# Altium PCB Board IO.PcbDoc
Units mm, origin at the board's own origin, x right, y up, seen from the top; angles counter-clockwise.
Board outline 146 x 86 mm, 2 copper layers (Top Layer, Bottom Layer); 27 components, 26 nets, 52 pads, 0 vias.
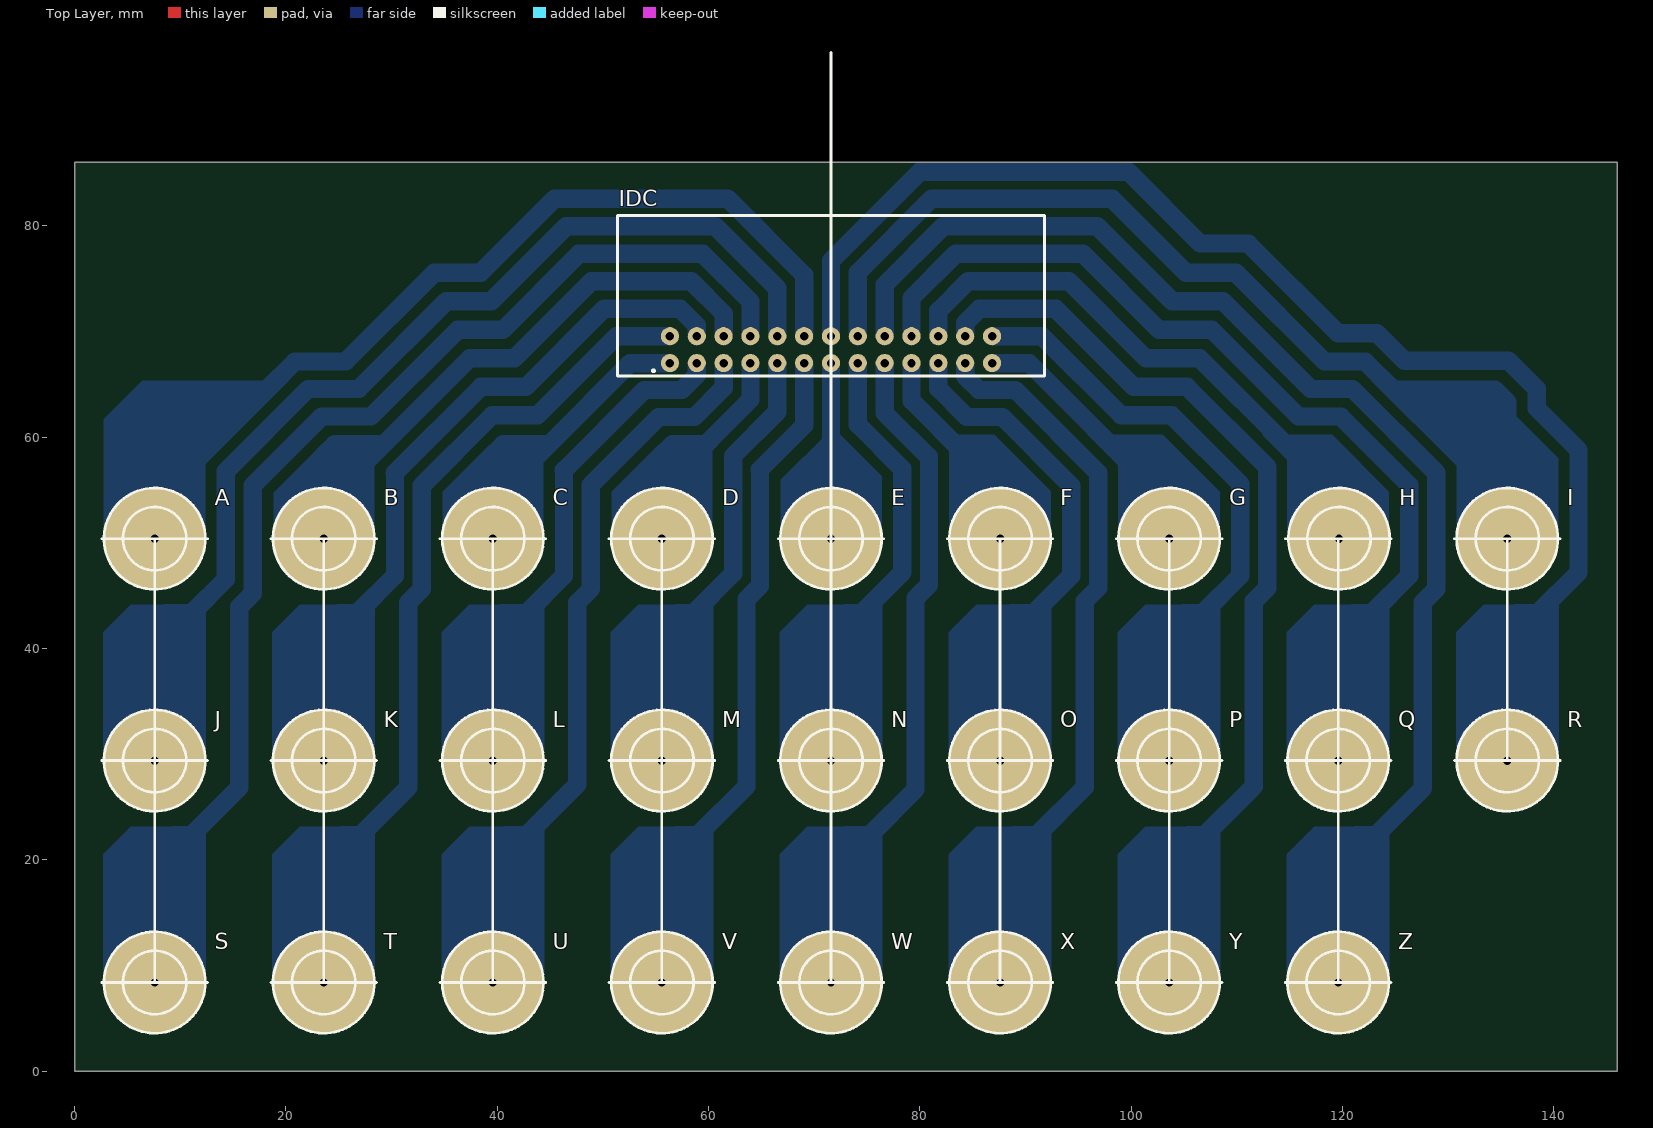
[diagram p0: Top Layer view]
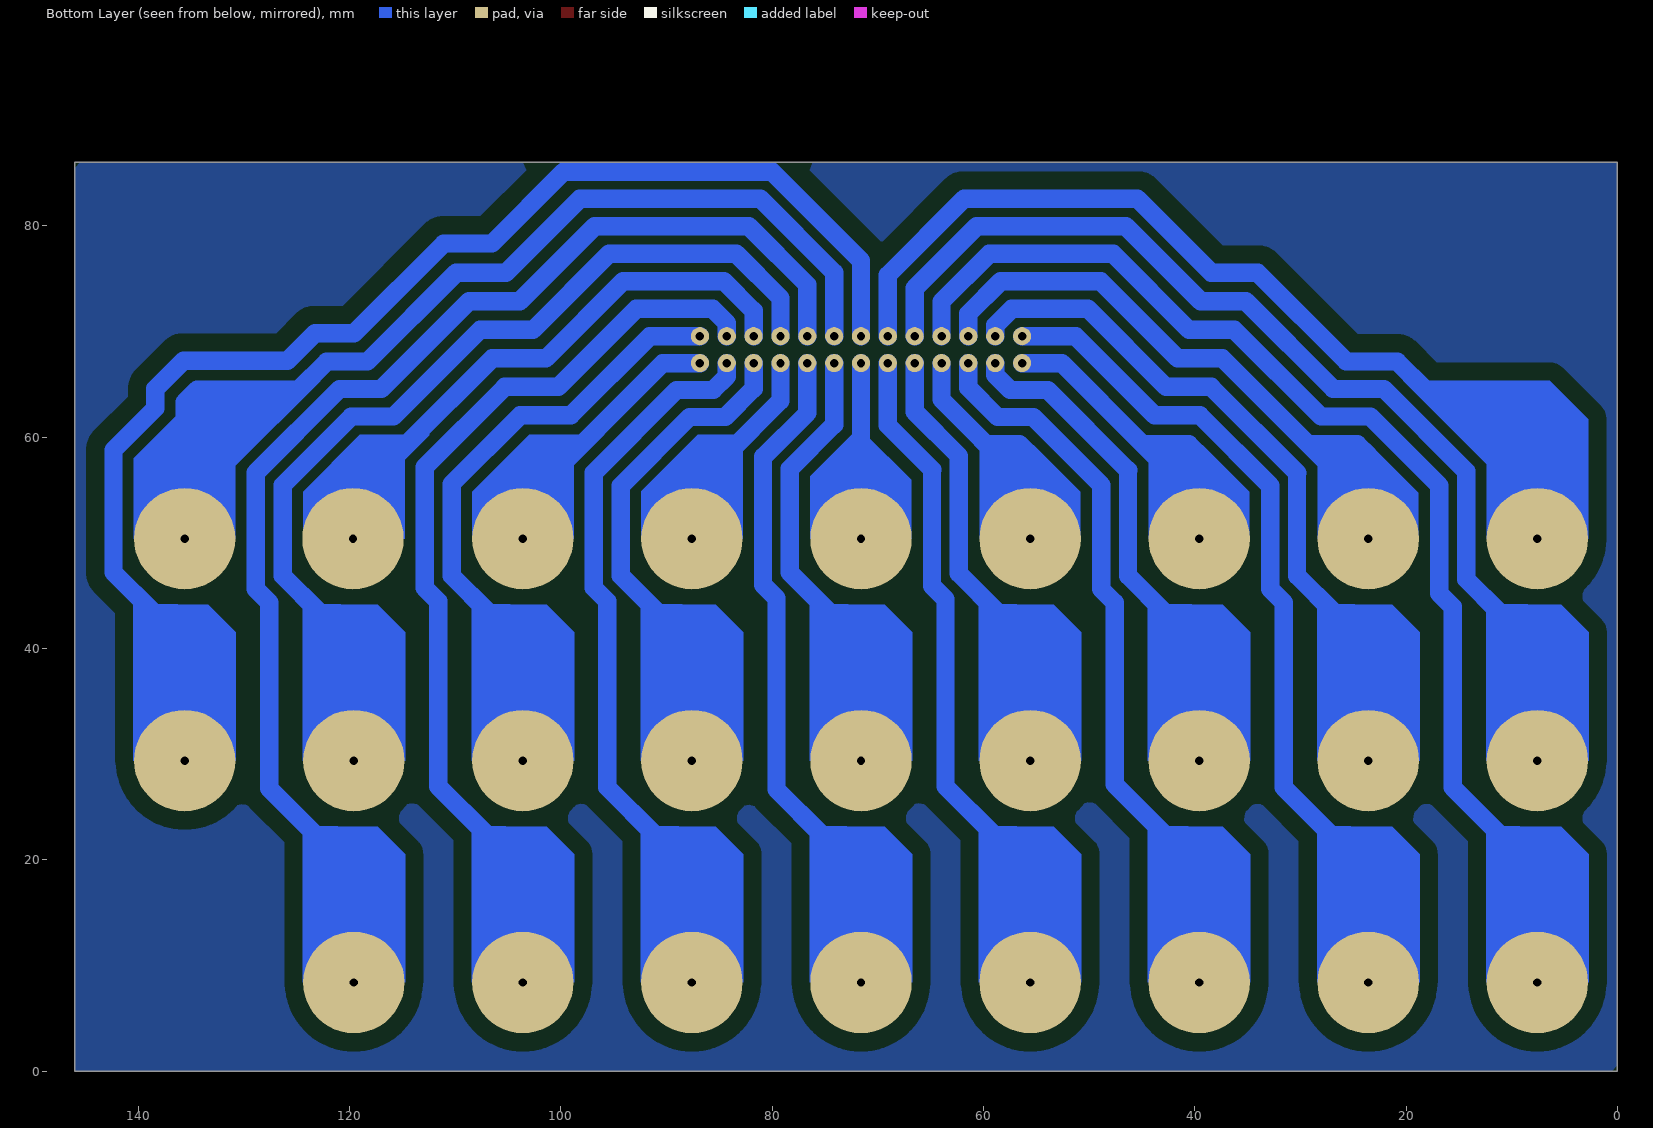
[diagram p1: Bottom Layer view, seen from below]

## Layer stack, top to bottom
Top Solder: solder mask 0.0102, Solder Resist, Dk 3.5
Top Layer: signal copper 0.0356
Dielectric 1: dielectric 0.32, FR-4, Dk 4.8
Bottom Layer: signal copper 0.0356
Bottom Solder: solder mask 0.0102, Solder Resist, Dk 3.5

## Board outline
0,0 146.004,0 146.004,86.004 0,86.004

## Design rules (kind name [scope] priority, off if disabled: settings)
Clearance [All] p1: gap=1.75 ignorepadtopadclearanceinfootprint=FALSE
PolygonConnect [All] p1: connectstyle=Relief reliefconductorwidth=0.254 reliefentries=4 polygonreliefangle="90 Angle" airgapwidth=0.254
RoutingVias [All] p1: holewidth=0.711 width=1.27 viastyle="Through Hole" minholewidth=0.711 minwidth=1.27 maxholewidth=0.711 maxwidth=1.27
SolderMaskExpansion [All] p1: expansion=0.102
Width [All] p1: maxlimit=0.254 minlimit=0.254 preferedwidth=0.254
30 further rules are at their usual default settings.

## Components (designator, comment, footprint, x,y, rotation, side; value= is the part's Value field where it differs from the comment)
A "Female_Connector_Banana" F_BANANA 7.581,50.389 r0 top locked
B "Female_Connector_Banana" F_BANANA 23.581,50.389 r0 top locked
C "Female_Connector_Banana" F_BANANA 39.581,50.389 r0 top locked
D "Female_Connector_Banana" F_BANANA 55.581,50.389 r0 top locked
E "Female_Connector_Banana" F_BANANA 71.581,50.389 r0 top locked
F "Female_Connector_Banana" F_BANANA 87.581,50.389 r0 top locked
G "Female_Connector_Banana" F_BANANA 103.581,50.389 r0 top locked
H "Female_Connector_Banana" F_BANANA 119.655,50.389 r0 top locked
I "Female_Connector_Banana" F_BANANA 135.581,50.389 r0 top locked
IDC "CONNECTOR_IO" SHDRRA26W62P254_2X13_4023X957X920P 71.581,68.274 r0 top locked
J "Female_Connector_Banana" F_BANANA 7.581,29.389 r0 top locked
K "Female_Connector_Banana" F_BANANA 23.581,29.389 r0 top locked
L "Female_Connector_Banana" F_BANANA 39.581,29.389 r0 top locked
M "Female_Connector_Banana" F_BANANA 55.581,29.389 r0 top locked
N "Female_Connector_Banana" F_BANANA 71.581,29.389 r0 top locked
O "Female_Connector_Banana" F_BANANA 87.581,29.389 r0 top locked
P "Female_Connector_Banana" F_BANANA 103.581,29.389 r0 top locked
Q "Female_Connector_Banana" F_BANANA 119.581,29.389 r0 top locked
R "Female_Connector_Banana" F_BANANA 135.581,29.389 r0 top locked
S "Female_Connector_Banana" F_BANANA 7.581,8.389 r0 top locked
T "Female_Connector_Banana" F_BANANA 23.581,8.389 r0 top locked
U "Female_Connector_Banana" F_BANANA 39.581,8.389 r0 top locked
V "Female_Connector_Banana" F_BANANA 55.581,8.389 r0 top locked
W "Female_Connector_Banana" F_BANANA 71.581,8.389 r0 top locked
X "Female_Connector_Banana" F_BANANA 87.581,8.389 r0 top locked
Y "Female_Connector_Banana" F_BANANA 103.581,8.389 r0 top locked
Z "Female_Connector_Banana" F_BANANA 119.581,8.389 r0 top locked

## Footprints (in the part's own frame and the unit in brackets; to place one, negate y for a bottom-side part, rotate by r counter-clockwise, add the part's x,y. Pads: shape width x height; smd on the part's side, far side on the other; paste and mask are expansions set on the pad)
F_BANANA [mm]
  round 9.6 hole 0.8: 1(0,0)
  silkscreen extent -4.8,-4.8 4.8,4.8
SHDRRA26W62P254_2X13_4023X957X920P [mm]
  round 1.72 hole 0.8: 1(-15.24,-1.27) 2(-15.24,1.27) 3(-12.7,-1.27) 4(-12.7,1.27) 5(-10.16,-1.27) 6(-10.16,1.27) 7(-7.62,-1.27) 8(-7.62,1.27) 9(-5.08,-1.27) 10(-5.08,1.27) 11(-2.54,-1.27) 12(-2.54,1.27) 13(0,-1.27) 14(0,1.27) 15(2.54,-1.27) 16(2.54,1.27) 17(5.08,-1.27) 18(5.08,1.27) 19(7.62,-1.27) 20(7.62,1.27) 21(10.16,-1.27) 22(10.16,1.27) 23(12.7,-1.27) 24(12.7,1.27) 25(15.24,-1.27) 26(15.24,1.27)
  silkscreen extent -20.2,-2.5 20.2,12.7, body extent -20.11,-1.58 20.12,12.64, height 9.2

## Part data
IDC: "Connector", Arrow Part Number=75867-105LF, Manufacturer_Name=Amphenol, Mouser Part Number=649-75867-105LF, Arrow Price/Stock=https://www.arrow.com/en/products/75867-105lf/amphenol-fci, Datasheet Link=https://cdn.amphenol-icc.com/media/wysiwyg/files/drawing/75867.pdf, Height=9.2mm, Manufacturer_Part_Number=75867-105LF, Mouser Price/Stock=https://www.mouser.com/Search/Refine.aspx?Keyword=649-75867-105LF

## Nets (pads, with @x,y where several pads share a name; then routed paths per layer and width w, separated by ;. In a path a pad name is that pad's centre, name@x,y a point inside that pad or via, vN(x,y) a via of type N, cw(c..) or ccw(c..) an arc to the next point about the centre after c; other vN are vias at no path point)
NetA_1: A.1 IDC.12 | length 91.1
  Bottom Layer w1.74: A.1 7.581,63.275 8.78,64.474 18.18,64.474 20.855,67.149 25.655,67.149 34.055,75.549 38.43,75.549 45.43,82.549 61.83,82.549 69.041,75.338 IDC.12
NetB_1: B.1 IDC.6 | length 56
  Bottom Layer w1.74: B.1 23.581,58.3 24.63,59.349 29.28,59.349 37.38,67.449 41.605,67.449 48.902,74.746 58.358,74.746 61.421,71.683 IDC.6
NetC_1: C.1 IDC.1 | length 28.3
  Bottom Layer w1.74: C.1 39.581,58.35 40.58,59.349 44.93,59.349 52.585,67.004 IDC.1
NetD_1: D.1 IDC.7 | length 21.9
  Bottom Layer w1.74: D.1 55.581,58.35 56.58,59.349 59.755,59.349 63.961,63.555 IDC.7
NetE_1: E.1 IDC.13 | length 16.6
  Bottom Layer w1.74: E.1 IDC.13
NetF_1: F.1 IDC.19 | length 22
  Bottom Layer w1.74: IDC.19 79.201,63.453 83.305,59.349 86.655,59.349 87.581,58.423 F.1
NetG_1: G.1 IDC.25 | length 28.3
  Bottom Layer w1.74: IDC.25 90.325,67.004 97.98,59.349 102.63,59.349 103.581,58.398 G.1
NetH_1: H.1 IDC.22 | length 56.3
  Bottom Layer w1.74: IDC.22 81.741,71.942 84.544,74.745 94.109,74.745 101.405,67.449 106.48,67.449 114.58,59.349 118.71,59.349 119.655,58.404 H.1
NetI_1: I.1 IDC.16 | length 91.3
  Bottom Layer w1.74: IDC.16 74.121,75.574 81.096,82.549 98.18,82.549 105.18,75.549 109.88,75.549 118.28,67.149 122.13,67.149 124.805,64.474 134.405,64.474 135.581,63.298 I.1
NetIDC_2: IDC.2 T.1 | length 81.2
  Bottom Layer w1.74: T.1 23.581,20.475 25.43,22.324 27.055,22.324 31.581,26.85 31.581,44.35 32.86,45.629 32.86,55.399 ; 32.855,55.399 39.505,62.049 43.78,62.049 51.275,69.544 IDC.2
NetIDC_3: IDC.3 L.1 | length 49
  Bottom Layer w1.74: L.1 39.581,42.45 40.455,43.324 42.755,43.324 46.32,46.889 46.32,56.849 ; 46.305,56.849 53.908,64.452 57.458,64.452 58.881,65.875 IDC.3
NetIDC_4: IDC.4 K.1 | length 67.7
  Bottom Layer w1.74: K.1 23.581,41.874 25.031,43.324 26.755,43.324 30.32,46.889 30.32,56.599 ; 30.305,56.599 38.455,64.749 42.705,64.749 50.101,72.145 57.309,72.145 58.881,70.573 IDC.4
NetIDC_5: IDC.5 U.1 | length 70.8
  Bottom Layer w1.74: U.1 39.581,21.125 40.78,22.324 42.755,22.324 47.581,27.15 47.581,44.35 48.86,45.629 48.86,55.449 ; 48.83,55.449 55.282,61.901 58.657,61.901 61.421,64.665 IDC.5
NetIDC_8: IDC.8 S.1 | length 113.2
  Bottom Layer w1.74: S.1 7.581,20.499 9.406,22.324 11.055,22.324 15.581,26.85 15.581,43.93 16.86,45.209 16.86,55.411 23.398,61.949 28.055,61.949 36.255,70.149 40.53,70.149 47.728,77.347 59.432,77.347 63.961,72.818 IDC.8
NetIDC_9: IDC.9 M.1 | length 43
  Bottom Layer w1.74: M.1 55.581,41.874 57.031,43.324 58.555,43.324 62.32,47.089 62.32,58.199 ; 62.305,58.199 66.501,62.395 IDC.9
NetIDC_10: IDC.10 J.1 | length 100.3
  Bottom Layer w1.74: J.1 7.581,42.249 8.656,43.324 11.086,43.324 14.32,46.558 14.32,56.767 22.102,64.549 26.88,64.549 35.18,72.849 39.43,72.849 46.529,79.948 60.631,79.948 66.501,74.078 IDC.10
NetIDC_11: IDC.11 V.1 | length 65.3
  Bottom Layer w1.74: V.1 55.581,20.875 57.03,22.324 58.955,22.324 63.581,26.95 63.581,44.65 64.86,45.929 64.86,56.924 ; 64.855,56.924 69.041,61.11 IDC.11
NetIDC_14: IDC.14 R.1 | length 126.7
  Bottom Layer w1.74: IDC.14 71.581,76.691 79.999,85.109 99.72,85.109 106.505,78.324 111.055,78.324 119.555,69.824 123.255,69.824 125.855,67.224 135.699,67.224 138.355,64.568 138.355,62.744 142.32,58.779 142.32,47.189 138.455,43.324 136.424,43.324 135.581,42.481 R.1
NetIDC_15: IDC.15 N.1 | length 43
  Bottom Layer w1.74: N.1 71.581,41.949 72.956,43.324 74.455,43.324 78.32,47.189 78.32,56.999 ; IDC.15 74.121,61.183 78.305,56.999
NetIDC_17: IDC.17 W.1 | length 65.4
  Bottom Layer w1.74: W.1 71.581,20.774 73.131,22.324 75.255,22.324 79.581,26.65 79.581,44.75 80.86,46.029 80.86,58.124 ; IDC.17 76.661,62.293 80.83,58.124
NetIDC_18: IDC.18 Z.1 | length 122.2
  Bottom Layer w1.74: IDC.18 76.661,74.405 82.204,79.948 96.781,79.948 103.88,72.849 108.68,72.849 116.98,64.549 120.93,64.549 128.86,56.619 128.86,45.629 127.581,44.35 127.581,26.75 123.155,22.324 121.275,22.324 119.581,20.63 Z.1
NetIDC_20: IDC.20 Q.1 | length 91.4
  Bottom Layer w1.74: IDC.20 79.201,73.161 83.387,77.347 95.432,77.347 102.63,70.149 107.63,70.149 115.83,61.949 119.805,61.949 126.32,55.434 126.32,46.889 122.755,43.324 121,43.324 119.581,41.905 Q.1
NetIDC_21: IDC.21 O.1 | length 48.8
  Bottom Layer w1.74: IDC.21 81.741,64.588 84.428,61.901 87.803,61.901 94.305,55.399 ; O.1 87.581,42.2 88.705,43.324 90.755,43.324 94.32,46.889 94.32,55.399
NetIDC_23: IDC.23 X.1 | length 70.9
  Bottom Layer w1.74: IDC.23 84.281,65.748 85.577,64.452 89.027,64.452 96.855,56.624 ; X.1 87.581,20.874 89.031,22.324 91.055,22.324 95.581,26.85 95.581,44.45 96.86,45.729 96.86,56.624
NetIDC_24: IDC.24 Y.1 | length 90.1
  Bottom Layer w1.74: IDC.24 84.281,70.8 85.626,72.145 92.834,72.145 100.23,64.749 105.28,64.749 112.86,57.169 112.86,45.729 111.581,44.45 111.581,26.95 106.955,22.324 105.381,22.324 103.581,20.524 Y.1
NetIDC_26: IDC.26 P.1 | length 59.3
  Bottom Layer w1.74: IDC.26 91.56,69.544 99.03,62.074 ; 99.03,62.049 103.83,62.049 110.32,55.559 110.32,46.889 106.755,43.324 104.955,43.324 103.581,41.95 P.1

## Polygon pours and split planes (outlines as drawn)
no net on Bottom Layer "Bottom Layer-No Net" (solid, pour order 0): 146.008,86.004 0,86.004 -0.004,0 146.004,0

## Other copper
Bottom Layer:
  region net NetI_1: 135.581,50.389 135.582,50.39 140.381,50.39 140.381,58 133.101,65.28 122.769,65.28 130.781,57.268 130.781,50.378
  region net NetA_1: 17.819,65.344 20.28,65.344 12.381,57.445 12.381,50.386 2.781,50.386 2.781,61.704 6.426,65.349
  region net NetE_1: 71.581,50.389 66.782,50.389 66.842,50.449 66.842,55.941 71.287,60.386 72.293,60.386 76.38,56.299 76.38,50.384
  region net NetH_1: 124.381,50.389 124.381,54.831 118.993,60.219 112.406,60.219 114.781,57.844 114.781,50.389
  region net NetG_1: 108.381,50.389 108.381,54.812 102.974,60.219 95.88,60.219 98.781,57.318 98.781,50.389
  region net NetF_1: 92.381,50.389 92.381,54.857 87.019,60.219 81.205,60.219 82.781,58.643 82.781,50.389
  region: 114.555,50.224
  region net NetD_1: 60.855,59.224 60.355,58.724 60.355,50.389 50.855,50.389 50.855,54.824 55.255,59.224
  region net NetC_1: 46.029,59.224 44.355,57.55 44.355,50.389 34.855,50.389 34.855,54.824 39.255,59.224
  region net NetB_1: 30.355,59.224 28.355,57.224 28.355,50.389 18.855,50.389 18.855,54.724 23.355,59.224
  region net NetIDC_14: 130.731,29.389 130.731,41.524 133.331,44.124 140.431,44.124 140.431,29.389
  region net NetIDC_20: 114.731,29.389 114.731,41.524 117.331,44.124 124.431,44.124 124.431,29.389
  region net NetIDC_26: 98.731,29.389 98.731,41.524 101.331,44.124 108.431,44.124 108.431,29.389
  region net NetIDC_21: 82.731,29.389 82.731,41.524 85.331,44.124 92.431,44.124 92.431,29.389
  region net NetIDC_15: 66.731,29.389 66.731,41.524 69.331,44.124 76.431,44.124 76.431,29.389
  region net NetIDC_9: 50.731,29.389 50.731,41.524 53.331,44.124 60.431,44.124 60.431,29.389
  region net NetIDC_3: 34.731,29.389 34.731,41.524 37.331,44.124 44.431,44.124 44.431,29.389
  region net NetIDC_4: 18.731,29.389 18.731,41.524 21.331,44.124 28.431,44.124 28.431,29.389
  region net NetIDC_10: 2.731,29.389 2.731,41.524 5.331,44.124 12.431,44.124 12.431,29.389
  region net NetIDC_18: 114.731,8.389 114.731,20.524 117.331,23.124 124.431,23.124 124.431,8.389
  region net NetIDC_24: 98.731,8.389 98.731,20.524 101.331,23.124 108.431,23.124 108.431,8.389
  region net NetIDC_23: 82.731,8.389 82.731,20.524 85.331,23.124 92.431,23.124 92.431,8.389
  region net NetIDC_17: 66.731,8.389 66.731,20.524 69.331,23.124 76.431,23.124 76.431,8.389
  region net NetIDC_11: 50.731,8.389 50.731,20.524 53.331,23.124 60.431,23.124 60.431,8.389
  region net NetIDC_5: 34.731,8.389 34.731,20.524 37.331,23.124 44.431,23.124 44.431,8.389
  region net NetIDC_2: 18.731,8.389 18.731,20.524 21.331,23.124 28.431,23.124 28.431,8.389
  region net NetIDC_8: 2.731,8.389 2.731,20.524 5.331,23.124 12.431,23.124 12.431,8.389
  pour cut-out: 1.13,-0.576

## Silkscreen, mask and mechanical layers (free items; w line width, h text height)
Top Overlay:
  lines w0.254: 2.581,8.389 12.581,8.389 ; 2.581,29.389 12.581,29.389 ; 2.581,50.389 12.581,50.389 ; 7.581,8.389 7.581,50.389 ; 18.581,8.389 28.581,8.389 ; 18.581,29.389 28.581,29.389 ; 18.581,50.389 28.581,50.389 ; 23.581,8.389 23.581,50.389 ; 34.581,8.389 44.581,8.389 ; 34.581,29.389 44.581,29.389 ; 34.581,50.389 44.581,50.389 ; 39.581,8.389 39.581,50.389 ; 50.581,8.389 60.581,8.389 ; 50.581,29.389 60.581,29.389 ; 50.581,50.389 60.581,50.389 ; 55.581,8.389 55.581,50.389 ; 66.581,8.389 76.581,8.389 ; 66.581,29.389 76.581,29.389 ; 66.581,50.389 76.581,50.389 ; 71.581,8.389 71.581,50.389 71.581,96.392 ; 82.581,8.389 92.581,8.389 ; 82.581,29.389 92.581,29.389 ; 82.581,50.389 92.581,50.389 ; 87.501,50.389 87.581,50.389 87.581,8.389 ; 98.581,8.389 108.581,8.389 ; 98.581,29.389 108.581,29.389 ; 98.581,50.389 108.581,50.389 ; 103.581,8.389 103.581,50.389 ; 114.581,8.389 124.581,8.389 ; 114.581,29.389 124.581,29.389 ; 114.581,50.389 124.581,50.389 ; 119.581,8.389 119.581,50.389 ; 130.581,29.389 140.581,29.389 ; 130.581,50.389 140.581,50.389 ; 135.581,29.389 135.581,50.389

## Dimensions
0,86.004 to 146.004,86.004 on Top Overlay
0,0 to 0,86.004 on Top Overlay